# Altium PCB RaspberryPi.PcbDoc
Units mm, origin at the board's own origin, x right, y up, seen from the top; angles counter-clockwise.
Board outline 70.5 x 69 mm, 2 copper layers (Top Layer, Bottom Layer); 12 components, 11 nets, 134 pads, 7 vias.
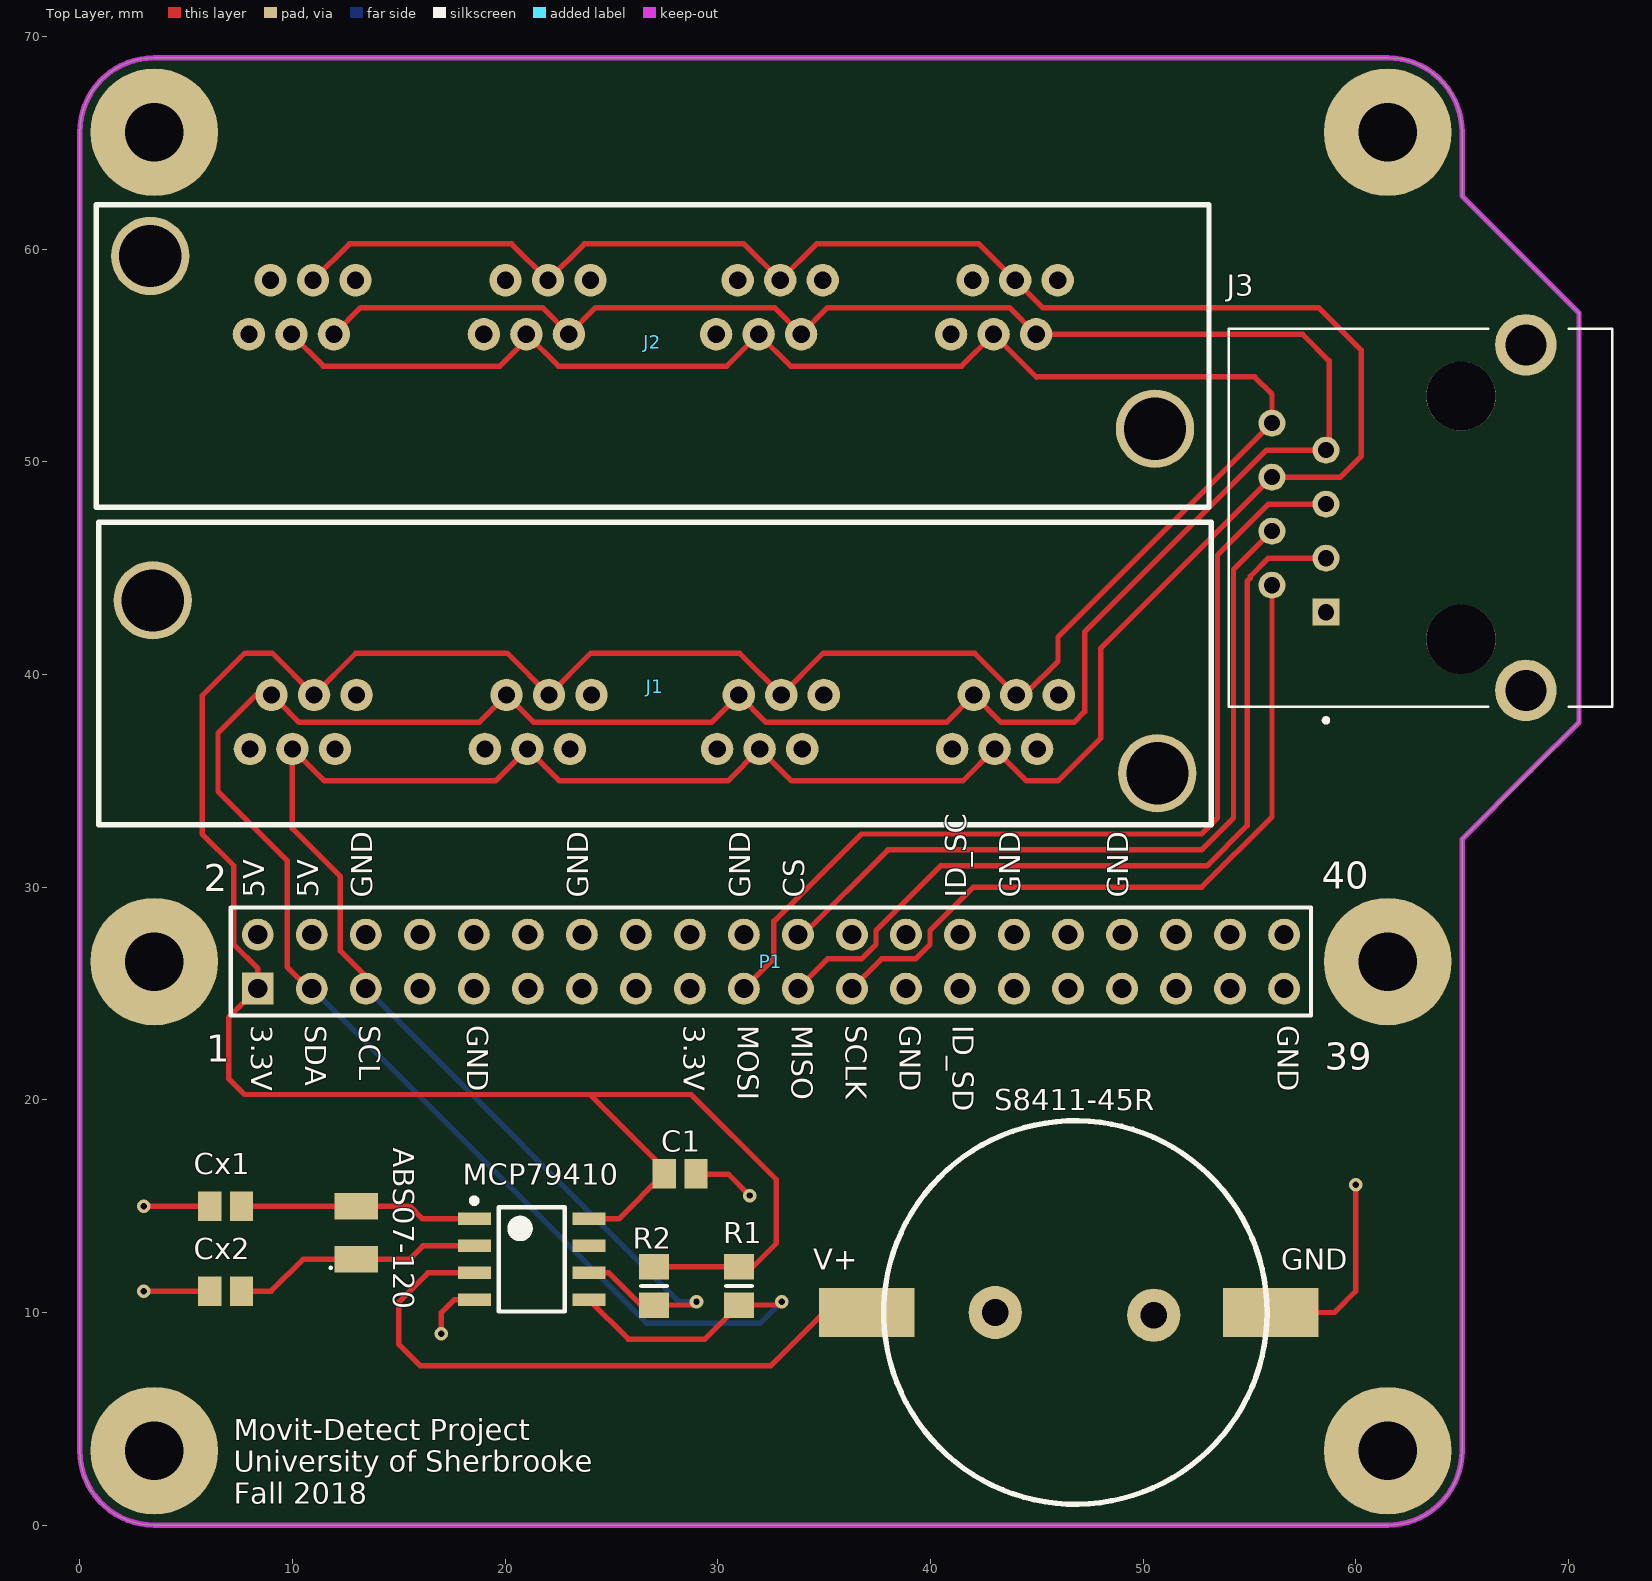
[diagram p0: Top Layer view]
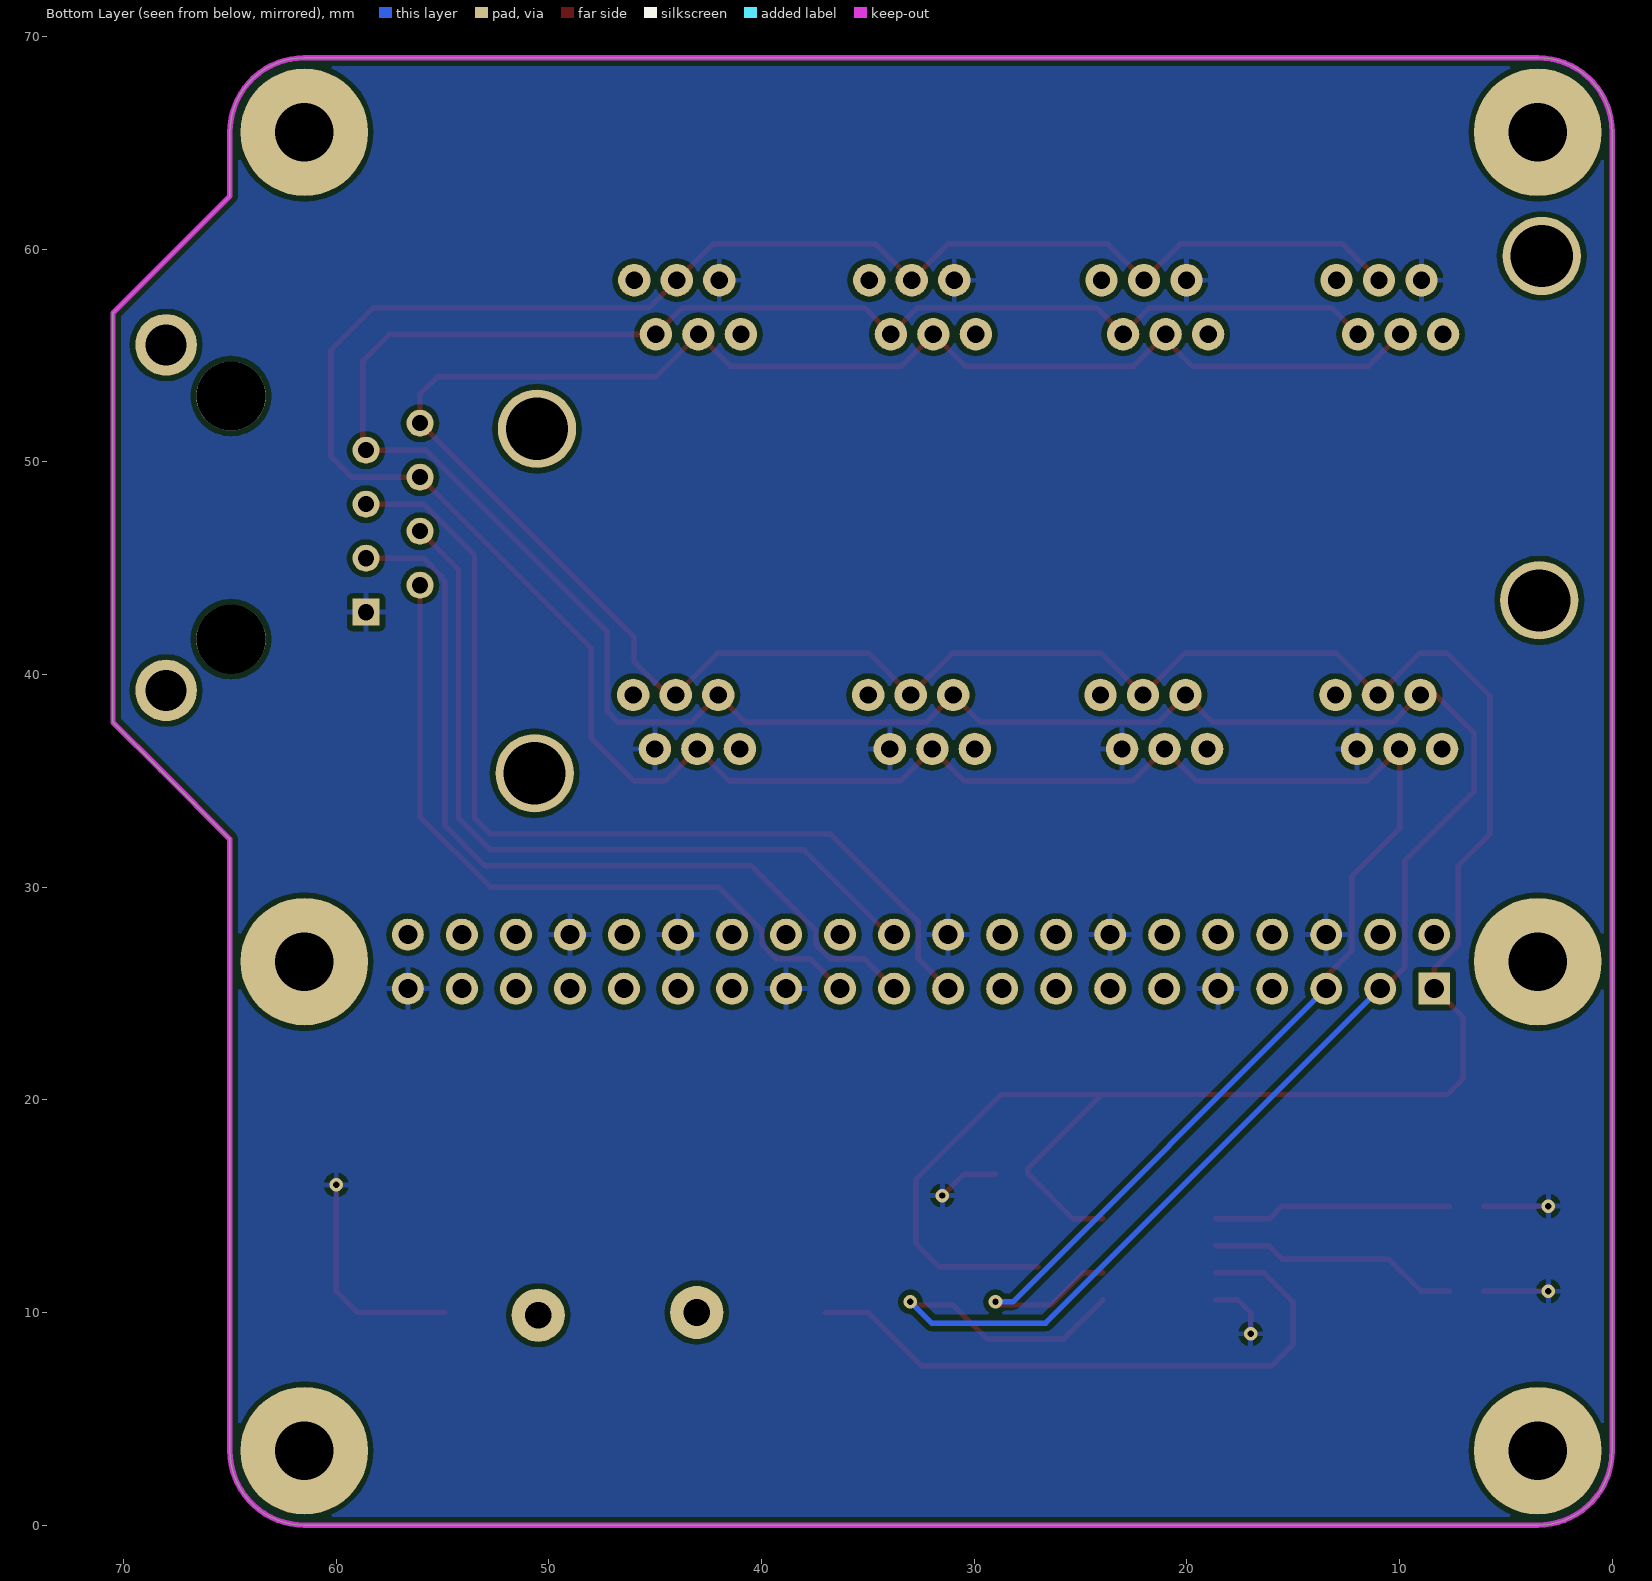
[diagram p1: Bottom Layer view, seen from below]
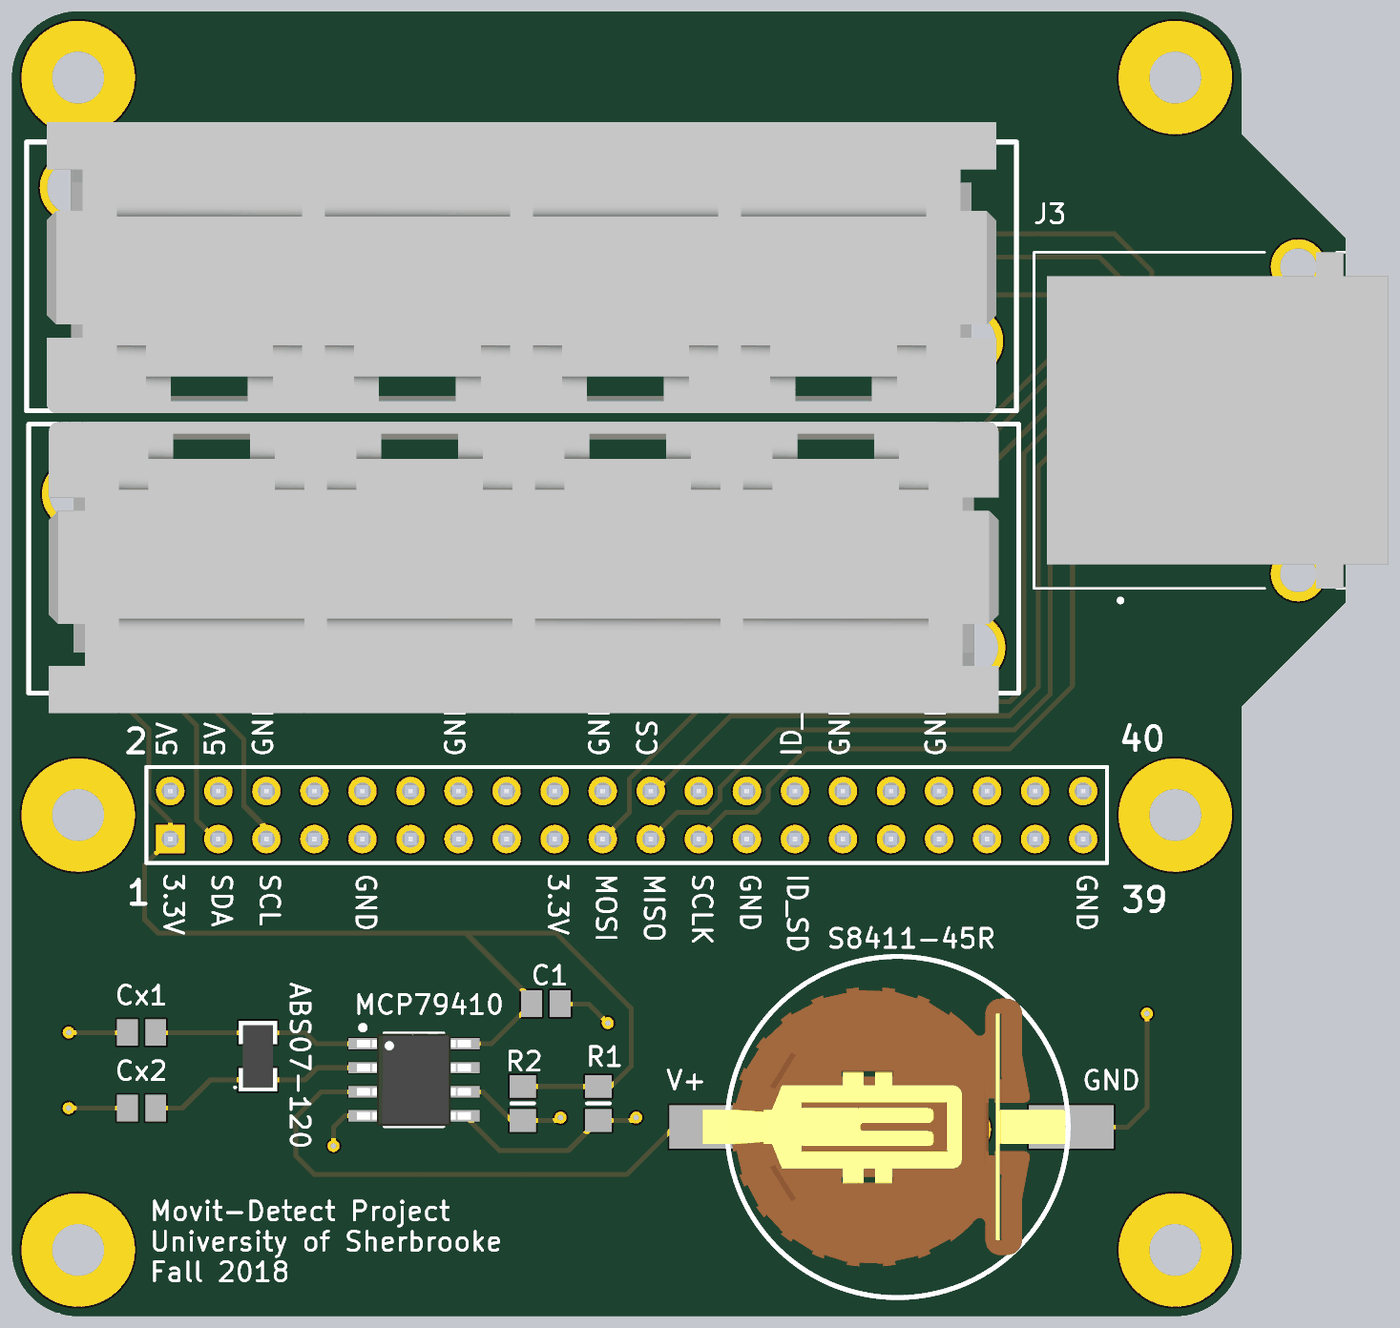
[diagram p2: 3D render of the assembled board from above, using the file's embedded part models]

## Layer stack, top to bottom
Top Solder: solder mask 0.0102, Solder Resist, Dk 3.5
Top Layer: signal copper 0.0356
Dielectric 1: dielectric 0.32, FR-4, Dk 4.8
Bottom Layer: signal copper 0.0356
Bottom Solder: solder mask 0.0102, Solder Resist, Dk 3.5

## Board outline
3.5,0 cw(c3.5,3.5) 0,3.5 0,65.5 cw(c3.5,65.5) 3.5,69 61.5,69 cw(c61.5,65.5) 65,65.5 65,62.5 70.5,57 70.5,37.75 68.25,35.5 65,32.25 65,3.5 cw(c61.5,3.5) 61.5,0

## Design rules (kind name [scope] priority, off if disabled: settings)
Clearance [All] p1: gap=0.254 ignorepadtopadclearanceinfootprint=FALSE except(0: Arc-Hole Track-Hole SMDPad-Hole THPad-Hole Via-Hole Fill-Hole Poly-Hole Region-Hole Text-Hole)
HoleSize [All] p1: absolutevalues=TRUE maxlimit=3.5 minlimit=0.025 maxpercent=80.000 minpercent=20.000
MinimumSolderMaskSliver [All] p1: minsoldermaskwidth=0.1
PolygonConnect [All] p1: connectstyle=Relief reliefconductorwidth=0.254 reliefentries=4 polygonreliefangle="90 Angle" airgapwidth=0.254
RoutingVias [All] p1: holewidth=0.711 width=1.27 viastyle="Through Hole" minholewidth=0.711 minwidth=1.27 maxholewidth=0.711 maxwidth=1.27
SilkToSilkClearance [All] p1: silktosilkclearance=0.1
SilkToSolderMaskClearance [IsPad] p1: minsilkscreentomaskgap=0.1 clearancetoexposedcopper=TRUE
SolderMaskExpansion [All] p1: expansion=0.102
Width [All] p1: maxlimit=0.254 minlimit=0.254 preferedwidth=0.254
26 further rules are at their usual default settings.

## Components (designator, comment, footprint, x,y, rotation, side; value= is the part's Value field where it differs from the comment)
ABS07-120 "*" ECX-31B 13,13.75 r90 top
C1 "Cap 0.1uF" C0805 28.225,16.525 r180 top value=0.1F
Cx1 "Cap 6pF" C0805 6.854,15 r180 top value=6pF
Cx2 "Cap 6pF" C0805 6.854,11 r180 top value=6pF
J1 "*" TM2RE-2424 27.051,39.421 r0 top
J2 "*" TM2RE-2424 26.936,55.619 r180 top
J3 "RJ45-8N-B" TE_RJ45-8N-B 64.95,47.375 r90 top
MCP79410 "*" MCP79410 21.25,12.5 r0 top
P1 "Header 20X2" HDR2X20 32.119,25.738 r0 top
R1 "Res 10K" 6-0805_N 31,11.25 r90 top value=10K
R2 "Res 10K" 6-0805_N 27,11.25 r90 top value=10K
S8411-45R "*" S8411-45R 50.5,10 r90 top

## Footprints (in the part's own frame and the unit in brackets; to place one, negate y for a bottom-side part, rotate by r counter-clockwise, add the part's x,y. Pads: shape width x height; smd on the part's side, far side on the other; paste and mask are expansions set on the pad)
6-0805_N [mm] "Chip Resistor, Body 2.0x1.2mm, IPC Medium Density"
  rect 1.2x1.4 smd: 1(-0.9,0) 2(0.9,0)
  silkscreen extent 0,-0.6 0,0.6, body extent -1.07,-0.7 1.07,0.7, height 0.7
C0805 [mm] "Chip Capacitor, Body 2.0x1.3mm, IPC High Density"
  rect 1.1x1.4 smd: 1(-0.75,0) 2(0.75,0)
  body extent -1.1,-0.72 1.1,0.72, height 1.4
ECX-31B [mm] "Crystal at 32.768Hz"
  rect 1.25x2.05 smd: 1(-1.25,0) 2(1.25,0)
  silkscreen extent -1.7,1.15 -1.6,1.25, body extent -1.85,-1 1.85,1, height 0.9
HDR2X20 [mm] "Connector; Header; 20x2 Position"
  rect 1.5x1.5 hole 0.9: 1(-23.749,-0.508)
  round 1.5 hole 0.9: 2(-23.749,2.032) 3(-21.209,-0.508) 4(-21.209,2.032) 5(-18.669,-0.508) 6(-18.669,2.032) 7(-16.129,-0.508) 8(-16.129,2.032) 9(-13.589,-0.508) 10(-13.589,2.032) 11(-11.049,-0.508) 12(-11.049,2.032) 13(-8.509,-0.508) 14(-8.509,2.032) 15(-5.969,-0.508) 16(-5.969,2.032) 17(-3.429,-0.508) 18(-3.429,2.032) 19(-0.889,-0.508) 20(-0.889,2.032) 21(1.651,-0.508) 22(1.651,2.032) 23(4.191,-0.508) 24(4.191,2.032) 25(6.731,-0.508) 26(6.731,2.032) 27(9.271,-0.508) 28(9.271,2.032) 29(11.811,-0.508) 30(11.811,2.032) 31(14.351,-0.508) 32(14.351,2.032) 33(16.891,-0.508) 34(16.891,2.032) 35(19.431,-0.508) 36(19.431,2.032) 37(21.971,-0.508) 38(21.971,2.032) 39(24.511,-0.508) 40(24.511,2.032)
  silkscreen extent -25.02,-1.78 25.78,3.3, body extent -25.17,-1.74 25.93,3.26, height 8.5
MCP79410 [mm] "RTC"
  rect 1.55x0.6 smd mask+0.05: 1(-2.7,1.905) 2(-2.7,0.635) 3(-2.7,-0.635) 4(-2.7,-1.905) 5(2.7,-1.905) 6(2.7,-0.635) 7(2.7,0.635) 8(2.7,1.905)
  silkscreen extent -2.82,-2.45 1.55,2.88, body extent -3.01,-2.45 3.01,2.45, height 1.75
S8411-45R [mm] "Battery holder 12mm coin cell"
  rect 2.3x4.5 smd: 1(0,-5.5) 2(0,13.5)
  round 2.5 hole 1.25: ""(-0.127,0) ""(0,7.45)
  silkscreen extent -9.02,-5.33 9.02,12.7, body extent -7.37,-5.21 7.38,13.99, height 4.25
TE_RJ45-8N-B [mm]
  rect 1.268x1.268 hole 0.76: 1(-4.445,6.35)
  round 1.268 hole 0.76: 2(-3.175,8.89) 3(-1.905,6.35) 4(-0.635,8.89) 5(0.635,6.35) 6(1.905,8.89) 7(3.175,6.35) 8(4.445,8.89)
  round 2.895 hole 1.93: 9(-8.125,-3.05) 10(8.125,-3.05)
  round 3.25 hole 3.25 unplated: None(-5.715,0) None(5.715,0)
  silkscreen extent -9.63,-7.11 8.89,10.92, body extent -8.89,-7.8 8.89,10.24, height 12.36
TM2RE-2424 [mil]
  round 60 hole 32: 1(-552.6,-15) 2(-592.6,-115) 3(-631.3,-15) 4(-671.3,-115) 5(-710,-15) 6(-750,-115) 7(-117.6,-15) 8(-157.6,-115) 9(-196.3,-15) 10(-236.3,-115) 11(-275,-15) 12(-315,-115) 13(312.4,-15) 14(272.4,-115) 15(233.7,-15) 16(193.7,-115) 17(155,-15) 18(115,-115) 19(747.4,-15) 20(707.4,-115) 21(668.7,-15) 22(628.7,-115) 23(590,-15) 24(550,-115)
  round 145 hole 115: ""(-930,160) ""(930,-160)
  silkscreen extent -1030,-255 1030,305, body extent -988,-296 988,310, height 630

## Part data
ABS07-120: library part AB38T, "Oscillator 32.7680KHz", Supplier Part Number 1=535-11937-1-ND, Supplier 1=Digi-Key
C1: "Capacitor 0.1uF", Supplier Part Number 1=478-1395-1-ND, LatestRevisionDate=29-May-2009, LatestRevisionNote="IPC-7351 Footprint Added.", PackageDescription="Chip Capacitor", PackageReference=C1206, Published=8-Jun-2000, Publisher="Altium Limited", Supplier 1=Digi-Key
Cx1 Cx2: "Capacitor 6pF", Supplier Part Number 1=1276-1767-1-ND, LatestRevisionDate=29-May-2009, LatestRevisionNote="IPC-7351 Footprint Added.", PackageDescription="Chip Capacitor", PackageReference=C1206, Published=8-Jun-2000, Publisher="Altium Limited", Supplier 1=Digi-Key
J1 J2: library part TM2RE-2424(50), "Connector MOD JACK 4pos", Supplier Part Number 1=H11267-ND, Supplier 1=Digi-Key
J3: "Corcom; Filter; Signal Line; Modular; 8 Contacts; 1 Port Through Hole", Package=None, Supplier Part Number 1=CCM1500-ND, Availability=Good, MF="TE Connectivity", MP=RJ45-8N-B, Price="5.65 USD", SnapEDA_Link=https://www.snapeda.com/parts/RJ45-8N-B/TE%2520Connectivity%2520Corcom%2520Filters/view-part/?ref=snap, Supplier 1=Digi-Key
MCP79410: library part MCP79410, "RTC", Supplier Part Number 1=MCP79410T-I/SNCT-ND, Supplier 1=Digi-Key
P1: "Header, 20-Pin, Dual row", Supplier Part Number 1=609-3766-ND, LatestRevisionDate=17-Jul-2002, LatestRevisionNote="Re-released for DXP Platform.", Publisher="Altium Limited", Supplier 1=Digi-Key
R1 R2: "Resistor 10K", Supplier Part Number 1=311-10.0KCRCT-ND, LatestRevisionDate=29-May-2009, LatestRevisionNote="IPC-7351 Footprint Added.", PackageDescription="Chip Resistor", PackageReference=J1-0603, Published=8-Jun-2000, Publisher="Altium Limited", Supplier 1=Digi-Key
S8411-45R: library part S8411-45R, "12mm Battery holder", Supplier Part Number 1=952-1745-1-ND, Supplier 1=Digi-Key

## Free pads (board coordinates)
  round 6 hole 2.75: 1(3.5,65.5) 1(3.5,3.5) 1(3.5,26.5) 1(61.5,65.5) 1(61.5,3.5) 1(61.5,26.5)

## Via types
v1: diameter 0.635, hole 0.3, Top Layer to Bottom Layer, 7 vias

## Nets (pads, with @x,y where several pads share a name; then routed paths per layer and width w, separated by ;. In a path a pad name is that pad's centre, name@x,y a point inside that pad or via, vN(x,y) a via of type N, cw(c..) or ccw(c..) an arc to the next point about the centre after c; other vN are vias at no path point)
CS: J3.4 P1.22 | length 37
  Top Layer w0.254: P1.22 34.02,27.77 38,31.75 52.75,31.75 54.25,33.25 54.25,44.93 J3.4
GND: C1.1 Cx1.2 Cx2.2 J1.2 J1.8 J1.14 J1.20 J2.2 J2.8 J2.14 J2.20 J3.1 MCP79410.4 P1.6 P1.9 P1.14 P1.20 P1.25 P1.30 P1.34 P1.39 S8411-45R.1 | length 22.4
  Top Layer w0.254: v1(3,11) Cx2.2@6.054,11 ; v1(3,15) Cx1.2@6.054,15 ; v1(17,9) 17,10 17.595,10.595 MCP79410.4 MCP79410.4@18.654,10.595 ; C1.1@29,16.5 30.5,16.5 v1(31.5,15.5) ; S8411-45R.1@54.889,10 59,10 60,11 v1(60,16)
MISO: J3.3 P1.21 | length 40.4
  Top Layer w0.254: P1.21 35.179,26.639 36.778,26.639 37.441,27.302 37.441,27.961 40.481,31 53,31 54.891,32.891 54.891,44.391 55.045,44.545 55.045,44.62 55.895,45.47 J3.3
MOSI: J3.5 P1.19 | length 45.1
  Top Layer w0.254: P1.19 32.639,26.639 32.639,28.389 36.75,32.5 52.75,32.5 53.5,33.25 53.5,45.615 55.895,48.01 J3.5
NetABS07-120_1: ABS07-120.1 Cx2.1 MCP79410.2 | length 11.9
  Top Layer w0.254: Cx2.1@7.654,11 9,11 10.5,12.5 15.494,12.5 16.129,13.135 MCP79410.2 MCP79410.2@18.654,13.135
NetABS07-120_2: ABS07-120.2 Cx1.1 MCP79410.1 | length 11.2
  Top Layer w0.254: Cx1.1@7.654,15 15.519,15 16.114,14.405 MCP79410.1 MCP79410.1@18.654,14.405
NetMCP79410_3: MCP79410.3 S8411-45R.2 | length 29.7
  Top Layer w0.254: MCP79410.3@18.654,11.865 MCP79410.3 16.365,11.865 15,10.5 15,8.5 16,7.5 32.5,7.5 35,10 S8411-45R.2
SCL: J1.4 J1.10 J1.16 J1.22 J2.4 J2.10 J2.16 J2.22 J3.6 MCP79410.6 P1.5 R2.1 | length 163.2
  Top Layer w0.254: J1.4 10,32.75 12.25,30.5 12.25,27 13.45,25.8 P1.5 ; J1.4@10.49,36.5 10.49,36.01 11.5,35 19.549,35 J1.10 22.549,35 30.471,35 J1.16 33.471,35 41.52,35 J1.22 44.52,35 46,35 48,37 48,41.22 J3.6 59.28,49.28 60.25,50.25 60.25,55.25 58.25,57.25 45.277,57.25 J2.4 42.277,60.25 34.648,60.25 J2.10 31.228,60.25 23.726,60.25 J2.16 20.306,60.25 12.677,60.25 J2.22 ; MCP79410.6 24.885,11.865 26.4,10.35 R2.1 28.85,10.35 v1(29,10.5)
  Bottom Layer w0.254: P1.5 28.18,10.5 v1(29,10.5)
SCLK: J3.2 P1.23 | length 34.4
  Top Layer w0.254: P1.23 37.719,26.639 39.318,26.639 39.981,27.302 39.981,27.961 42.021,30 52.75,30 56.06,33.31 J3.2
SDA: J1.5 J1.11 J1.17 J1.23 J2.5 J2.11 J2.17 J2.23 J3.7 MCP79410.5 P1.3 R1.1 | length 172.1
  Top Layer w0.254: J1.5 8.29,39.04 6.5,37.25 6.5,34.5 9.75,31.25 9.75,26.25 10.77,25.23 P1.3 ; J1.5@9.063,38.547 9.209,38.547 9.36,38.697 10.307,37.75 18.776,37.75 J1.11 21.356,37.75 29.698,37.75 J1.17 32.278,37.75 40.747,37.75 J1.23 43.327,37.75 46.75,37.75 47.25,38.25 47.25,42 55.8,50.55 J3.7 58.75,50.7 58.75,54.75 57.5,56 J2.5 43.72,57.25 35.171,57.25 J2.11 32.671,57.25 24.249,57.25 J2.17 21.749,57.25 13.2,57.25 J2.23 ; MCP79410.5 25.795,8.75 29.4,8.75 R1.1 32.85,10.35 v1(33,10.5)
  Bottom Layer w0.254: P1.3 26.64,9.5 32,9.5 v1(33,10.5)
VCC: C1.2 J1.3 J1.9 J1.15 J1.21 J2.3 J2.9 J2.15 J2.21 J3.8 MCP79410.8 P1.1 R1.2 R2.2 | length 181.9
  Top Layer w0.254: J2.21 11.451,54.5 19.75,54.5 20.676,55.426 20.676,55.596 20.523,55.75 20.523,56.324 J2.15@20.676,56.324 ; J2.15 22.5,54.5 30.422,54.5 J2.9 33.422,54.5 41.471,54.5 J2.3 45,53.971 45.029,54 55.25,54 56.06,53.19 J3.8 46,41.76 46,40.621 44.526,39.147 44.526,38.697 J1.21@44.379,38.697 ; MCP79410.8 25.355,14.405 C1.2 27.475,16.775 24,20.25 ; R2.2 R1.2 31.65,12.15 32.75,13.25 32.75,16.25 28.75,20.25 24,20.25 ; J1.21 42.076,41 34.947,41 J1.15 31.027,41 24.025,41 J1.9 20.105,41 12.976,41 J1.3 9.056,41 7.75,41 5.75,39 5.75,32.5 7.239,31.011 7.239,27.302 8.37,26.171 P1.1 7,23.86 7,21 7.75,20.25 24,20.25
pads on no net: J1. J1.1 J1.6 J1.7 J1.12 J1.13 J1.18 J1.19 J1.24 J2. J2.1 J2.6 J2.7 J2.12 J2.13 J2.18 J2.19 J2.24 J3.9 J3.10 J3.None MCP79410.7 P1.2 P1.4 P1.7 P1.8 P1.10 P1.11 P1.12 P1.13 P1.15 P1.16 P1.17 P1.18 P1.24 P1.26 P1.27 P1.28 P1.29 P1.31 P1.32 P1.33 P1.35 P1.36 P1.37 P1.38 P1.40 S8411-45R.

## Polygon pours and split planes (outlines as drawn)
no net on Top Layer "NONET_L01_P005" (none, pour order 5): 0,0
GND on Bottom Layer "GND_L02_P015" (solid, pour order 15): 3.5,0 cw(c3.5,3.5) 0,3.5 0,65.5 cw(c3.5,65.5) 3.5,69 61.5,69 cw(c61.5,65.5) 65,65.5 65,62.5 70.5,57 70.5,37.75 68.25,35.5 65,32.25 65,3.5 cw(c61.5,3.5) 61.5,0

## Keep-outs
Keep-Out Layer:
  lines w0.254: 0,3.5 ccw(c3.5,3.5) 3.5,0 61.5,0 ccw(c61.5,3.5) 65,3.5 65,30 65,32.25 68.25,35.5 70.5,37.75 70.5,57 65,62.5 65,65.5 ccw(c61.5,65.5) 61.5,69 3.5,69 ccw(c3.5,65.5) 0,65.5 0,3.5

## Other copper
Top Layer:
  pour cut-out: 3.5,0 cw(c3.5,3.5) 0,3.5 0,65.5 cw(c3.5,65.5) 3.5,69 61.5,69 cw(c61.5,65.5) 65,65.5 65,62.5 70.5,57 70.5,37.75 65,32.25 65,3.5 cw(c61.5,3.5) 61.5,0

## Silkscreen, mask and mechanical layers (free items; w line width, h text height)
Top Overlay:
  text "5V" at 8.67,29.5 h1 r90
  text "5V" at 11.21,29.5 h1 r90
  text "GND" at 13.75,29.5 h1 r90
  text "GND" at 23.91,29.5 h1 r90
  text "GND" at 31.53,29.5 h1 r90
  text "CS" at 34.07,29.5 h1 r90
  text "ID_SC" at 41.69,29.5 h1 r90
  text "GND" at 44.23,29.5 h1 r90
  text "GND" at 49.31,29.5 h1 r90
  text "3.3V" at 8.07,23.5 h1 r270
  text "SDA" at 10.61,23.5 h1 r270
  text "SCL" at 13.15,23.5 h1 r270
  text "GND" at 18.23,23.5 h1 r270
  text "3.3V" at 28.39,23.5 h1 r270
  text "MOSI" at 30.93,23.5 h1 r270
  text "MISO" at 33.47,23.5 h1 r270
  text "SCLK" at 36.01,23.5 h1 r270
  text "GND" at 38.55,23.5 h1 r270
  text "ID_SD" at 41.04,23.5 h1 r270
  text "GND" at 56.33,23.5 h1 r270
  text "V+" at 34.5,12 h1
  text "GND" at 56.5,12 h1
  text "Movit-Detect Project / University of Sherbrooke / Fall 2018" at 7.25,1 h1

## Text inside footprints (layer, text, board x,y; h text height)
P1: Top Overlay "39" at 58.535,21.42 h1.27; Top Overlay "40" at 58.408,29.929 h1.27; Top Overlay "2" at 5.83,29.802 h1.27; Top Overlay "1" at 5.957,21.801 h1.27